# EAGLE board BATT_CPU_TEST_BED_V2 (EAGLE 9.6.2)
REV: C
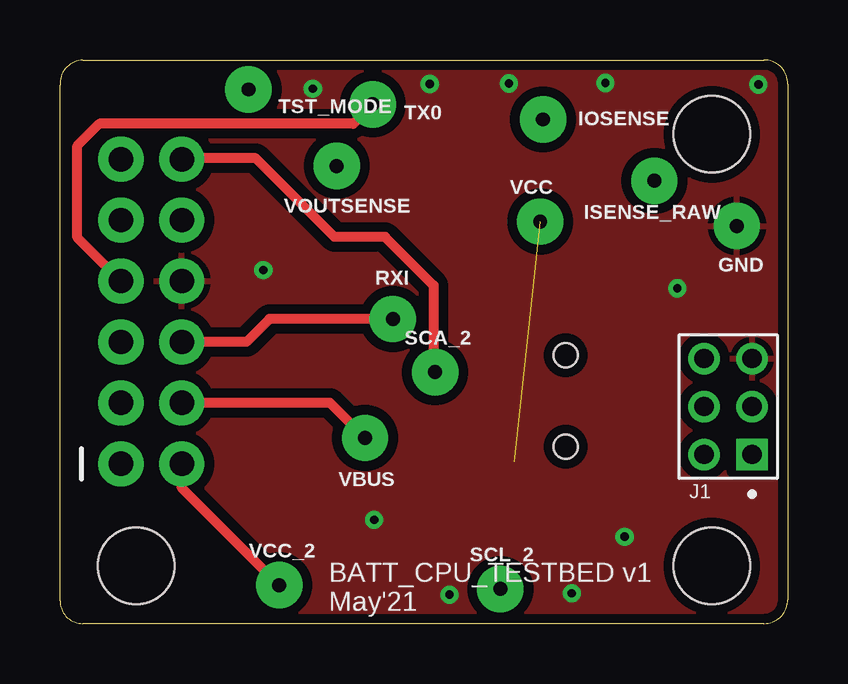
[diagram p0: board, top side]
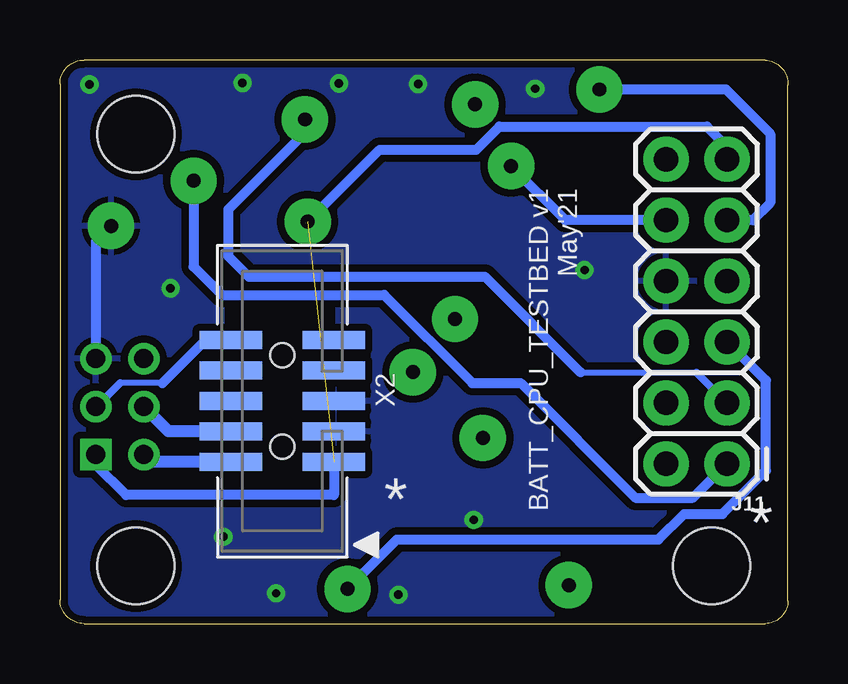
[diagram p1: board, bottom side, seen from below]

Size 30.35 x 23.5 mm. Coordinates in mm from the lower left corner, seen from the top.
Outline: 0.95,23.5 29.35,23.5 arc-90 30.35,22.5 30.35,1 arc-90 29.35,0 0.95,0 arc-90 0,0.95 0,22.45 arc-90 0.95,23.5
Copper layers (1+2*15+16): Top 0.035mm / dielectric 1.5mm / Route2 0.035mm / dielectric 0.15mm / Route15 0.035mm / dielectric 0.2mm / Bottom 0.035mm
Design rules "adafruit *": minimum track width 8mil, minimum drill 8mil, track to track 8mil, track to pad 8mil, pad to pad 8mil, via to via 8mil, smd to smd 8mil, copper to edge 10mil, drill to drill 8mil, minimum pad ring 10mil, minimum via ring 8mil, stop-mask expansion 2mil, vias tented up to drill 20mil, thermal gap 10mil
Net classes: 2 gnd: width 0.305 mm, drill 0.483 mm, clearance 0.203 mm
Holes 3.2 mm at 3.18,2.4 27.18,2.4 27.18,20.4
bRestrict: area 19.2,5.9 to 23.2,13.4

## Footprints (pad centres in the part's own frame; a part is rotated, then mirrored left to right if it is on the bottom)
1X01_POGOPIN_HOLE_0.061_DIA = drill 0.58 pad 1.93: 2 0,0
TE_2314820-6 = drill 0.8 pad 1.15 square: 1 0,0 | drill 0.8 pad 1.15: 2 0,2; 3 2,0; 4 2,2; 5 4,0; 6 4,2
2X6 = drill 1.016 pad 1.88: 1 0,0; 2 0,2.54; 3 2.54,0; 4 2.54,2.54; 5 5.08,0; 6 5.08,2.54; 7 7.62,0; 8 7.62,2.54; 9 10.16,0; 10 10.16,2.54; 11 12.7,0; 12 12.7,2.54
2X05_1.27MM_BOX_POSTS = smd 0.76 x 2.6: 1 -2.54,-2.15; 2 -2.54,2.15; 3 -1.27,-2.15; 4 -1.27,2.15; 5 0,-2.15; 6 0,2.15; 7 1.27,-2.15; 8 1.27,2.15; 9 2.54,-2.15; 10 2.54,2.15 | hole 1: -1.905,0; 1.905,0

## Placement (x,y rotation side)
GND  [1X01_POGOPIN_HOLE_0.061_DIA]  28.22,16.58 0 top
IOSENSE  [1X01_POGOPIN_HOLE_0.061_DIA]  20.14,21.02 0 top
ISENSE_RAW  [1X01_POGOPIN_HOLE_0.061_DIA]  24.78,18.46 0 top
J1  2314820-6  [TE_2314820-6]  28.85,7.05 90 top
J11  2X6 FEMALE  [2X6]  2.54,6.66 90 bottom
RXI  [1X01_POGOPIN_HOLE_0.061_DIA]  13.88,12.7 0 top
SCA_2  [1X01_POGOPIN_HOLE_0.061_DIA]  15.64,10.48 0 top
SCL_2  [1X01_POGOPIN_HOLE_0.061_DIA]  18.36,1.44 0 top
TST_MODE  [1X01_POGOPIN_HOLE_0.061_DIA]  7.86,22.27 0 top
TX0  [1X01_POGOPIN_HOLE_0.061_DIA]  13.04,21.65 0 top
VBUS  [1X01_POGOPIN_HOLE_0.061_DIA]  12.72,7.74 0 top
VCC  [1X01_POGOPIN_HOLE_0.061_DIA]  20.02,16.76 0 top
VCC_2  [1X01_POGOPIN_HOLE_0.061_DIA]  9.14,1.6 0 top
VOUTSENSE  [1X01_POGOPIN_HOLE_0.061_DIA]  11.54,19.08 0 top
X2  2x5 0.05" SWD  [2X05_1.27MM_BOX_POSTS]  21.08,9.28 90 bottom

## Library data of the parts
GND IOSENSE ISENSE_RAW RXI SCA_2 SCL_2 TST_MODE TX0 VBUS VCC VCC_2 VOUTSENSE = SparkFun-Connectors
J1 = connector 2x3-2mm; COMMENT: 2314820-6; DESCRIPTION: Socket Receptacle 6P,2MM,B-B,REC,DRVT,2.7,0.1AU,TB 6 POS; DIGI-KEY_PART_NUMBER: 17-2314820-6-ND; MF: TE Connectivity; MP: 2314820-6; PACKAGE: None; PURCHASE-URL: https://pricing.snapeda.com/search/part/2314820-6/?ref=eda
J11 = SparkFun-Connectors; PROD_ID: CONN-12423
X2 = microbuilder

## Nets
!RESET: J1.3 X2.10
GND: GND.2 J1.5 J11.8 X2.3 X2.5
IOSENSE: IOSENSE.2 J11.3
ISENSE_RAW: ISENSE_RAW.2 J11.1
RXI: J11.6 RXI.2
SCA_2: J11.12 SCA_2.2
SCL_2: J11.5 SCL_2.2
SWCLK: J1.4 X2.4
SWDIO: J1.2 X2.2
TST_MODE: J11.9 TST_MODE.2
TXO: J11.7 TX0.2
VBUS: J11.4 VBUS.2
VCC: J1.1 J11.11 VCC.2 X2.1
VCC_2: J11.2 VCC_2.2
VOUTSENSE: J11.10 VOUTSENSE.2

## Tracks (layer width: path | path; a pad name or v marks a point on that pad's centre or on a via)
!RESET
  Bottom 0.254: J1.3 28.91,9.1 28.91,9.19 28.8,9.08 | 26.08,10.03 27.84,10.03
  Bottom 0.305: 28.8,9.08 27.84,10.03 | X2.10
  Bottom 0.406: X2.10 24.29,11.82 26.08,10.03
GND  (via drill 0.35)
  Bottom 0.406: GND.2 28.85,15.95 J1.5
  other vias: 13.1,4.32 16.24,1.2 21.34,1.26 23.54,3.62 25.74,13.98 29.12,22.48 22.74,22.54 18.72,22.52 15.42,22.5 10.54,22.3 8.48,14.74
  pour Bottom (isolate 0.305): -1.14,23.9 31.18,23.9 31.18,-0.6 -1.14,-0.6
  pour Top (isolate 0.406): 0.08,23.4 30.68,23.4 30.68,-0.6 0.08,-0.6
IOSENSE
  Bottom 0.254: 8.65,10.47 3.81,10.47
  Bottom 0.305: 3.81,10.47 J11.3
  Bottom 0.406: IOSENSE.2 20.14,20.46 23.34,17.26 23.34,15.32 22.48,14.46 12.64,14.46 8.65,10.47
ISENSE_RAW
  Bottom 0.406: J11.1 3.96,5.24 6.36,5.24 11.14,10.02 13.16,10.02 16.84,13.7 23.6,13.7 24.78,14.88 ISENSE_RAW.2
RXI
  Top 0.406: RXI.2 8.74,12.7 7.78,11.74 J11.6
SCA_2
  Top 0.406: SCA_2.2 15.58,10.54 15.58,14.1 13.56,16.12 11.44,16.12 8.16,19.4 5.12,19.4 J11.12
SCL_2
  Bottom 0.406: SCL_2.2 16.3,3.5 5.4,3.5 4.33,4.57 2.73,4.57 0.92,6.38 0.92,10.14 2.52,11.74 J11.5
SWCLK
  Bottom 0.508: X2.4 25.82,8.01 J1.4
SWDIO
  Bottom 0.254: 26.55,6.74 J1.2
  Bottom 0.508: X2.2 26.55,6.74
TST_MODE
  Bottom 0.406: TST_MODE.2 2.59,22.27 0.74,20.42 0.74,17.54 1.46,16.82 J11.9
TXO
  Top 0.406: J11.7 0.72,16.1 0.72,19.92 1.64,20.84 12.23,20.84 TX0.2
VBUS
  Top 0.406: VBUS.2 11.26,9.2 J11.4
VCC  (1 unrouted)
  Bottom 0.305: 28.85,6.62 J1.1
  Bottom 0.406: X2.1 18.93,5.36 27.6,5.36 28.85,6.62 | VCC.2 17.02,19.76 12.99,19.76 12.03,20.72 3.38,20.72 2.54,19.88 J11.11
VCC_2
  Top 0.406: VCC_2.2 5.08,5.66 J11.2
VOUTSENSE
  Bottom 0.406: J11.10 9.28,16.82 VOUTSENSE.2

## Text on the board
tNames: BATT_CPU_TESTBED v1 / May'21
bNames: BATT_CPU_TESTBED v1 / May'21 | * | *